# Altium PCB MainPCB.PcbDoc
Units mil, origin at the board's own origin, x right, y up, seen from the top; angles counter-clockwise.
Board outline 4750 x 2775 mil, 2 copper layers (Top Layer, Bottom Layer); 39 components, 86 nets, 187 pads, 29 vias.
Unrouted connection lines stored in the file: 1.
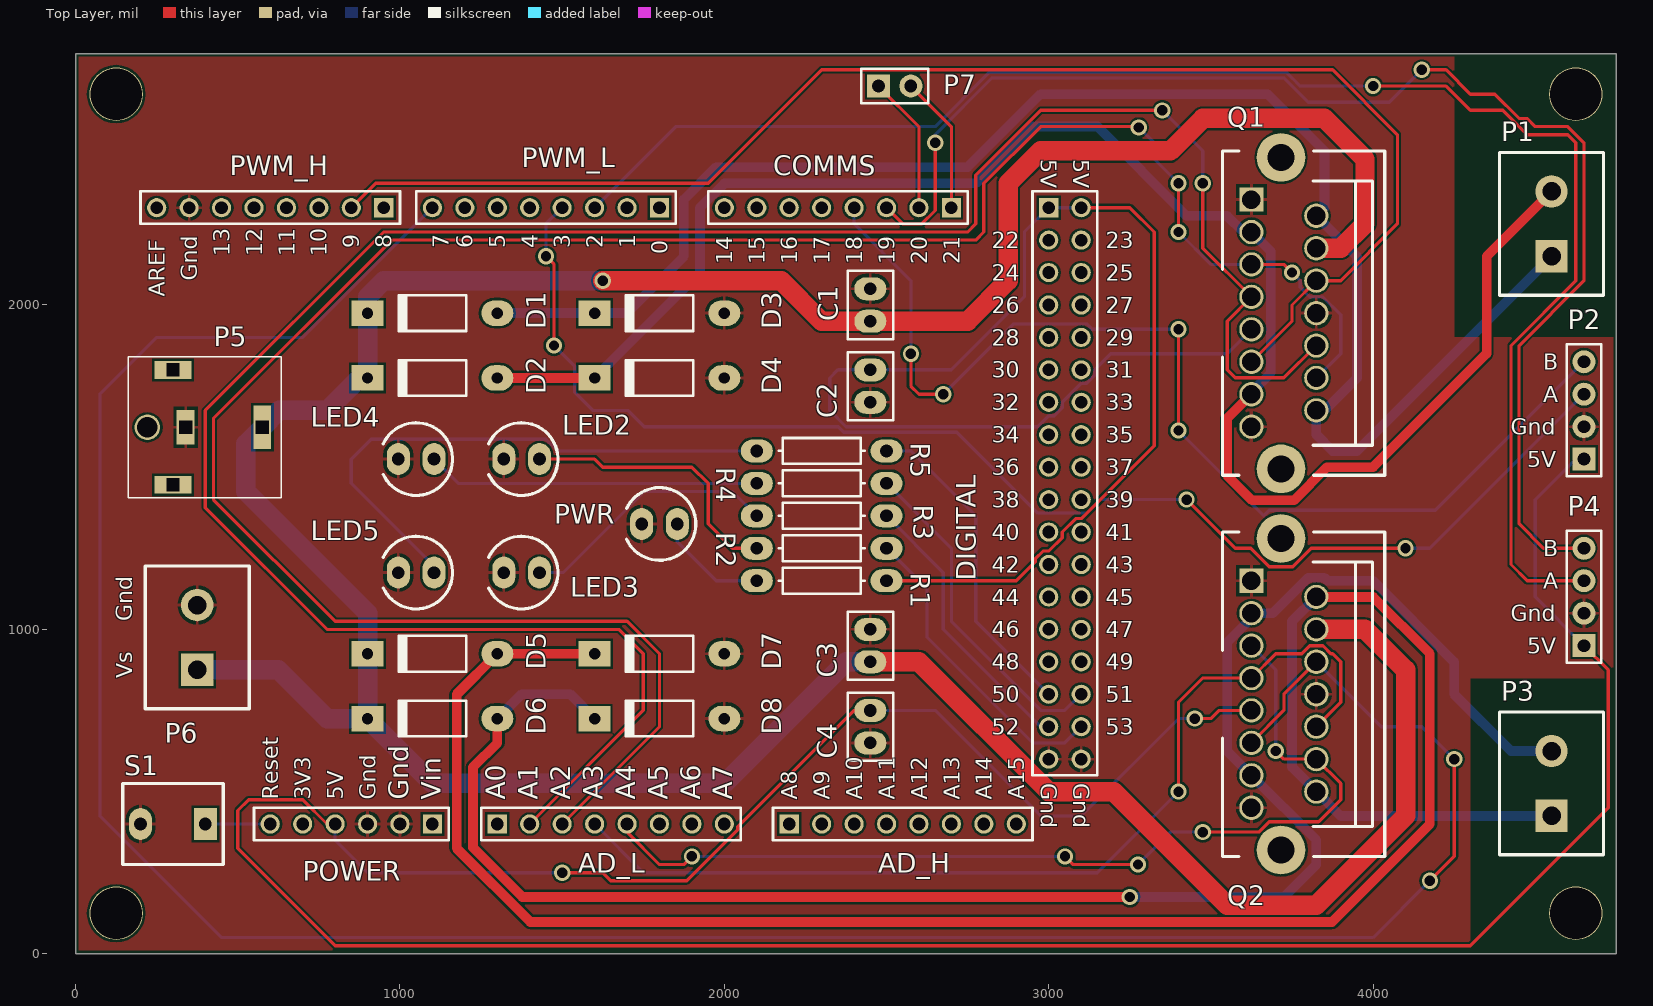
[diagram p0: Top Layer view]
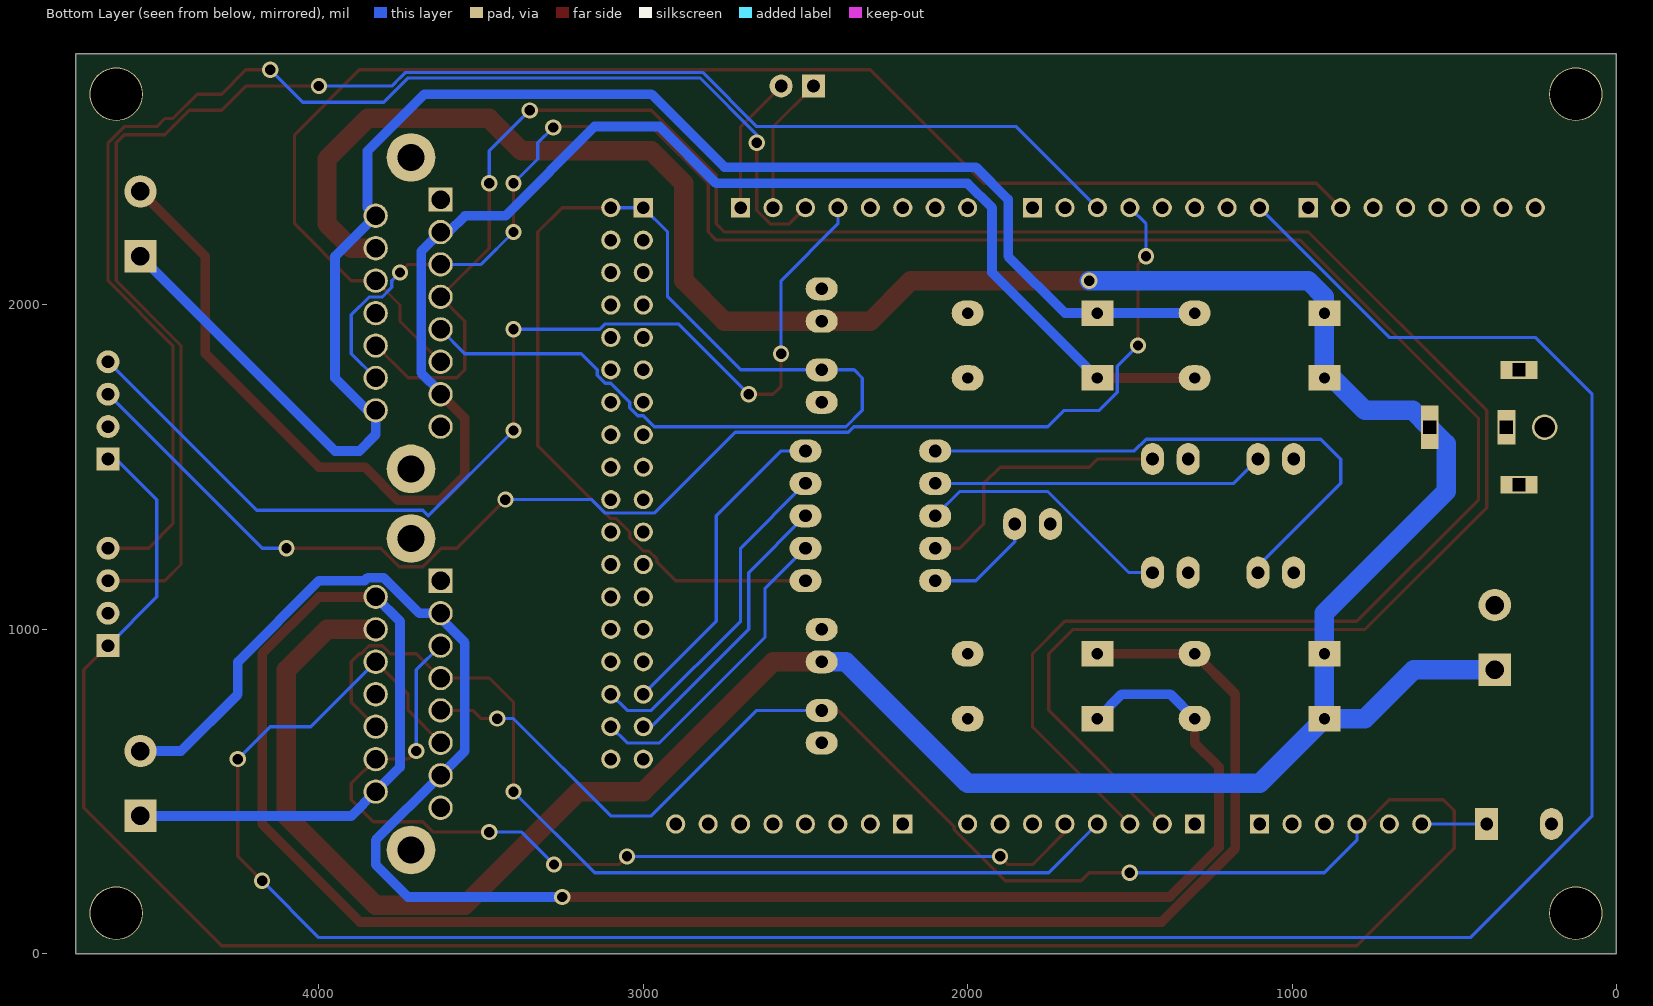
[diagram p1: Bottom Layer view, seen from below]

## Layer stack, top to bottom
Top Solder: solder mask 0.4, Solder Resist, Dk 3.5
Top Layer: signal copper 1.4
Dielectric 1: dielectric 12.6, FR-4, Dk 4.8
Bottom Layer: signal copper 1.4
Bottom Solder: solder mask 0.4, Solder Resist, Dk 3.5

## Board outline
0,0 4750,0 4750,2775 0,2775

## Design rules (kind name [scope] priority, off if disabled: settings)
AssemblyTestPointUsage [All] p1: valid=2
BoardOutlineClearance [All] p1: gap=10
Clearance [All] p1: gap=7
ComponentClearance [All] p1: gap=0 collisioncheckmode=3 verticalgap=0 showdistances=FALSE
FabricationTestPointUsage [All] p1: valid=2 allowmultiple=FALSE
FabricationTestPointUsage TestPointUsage [All] p2: valid=0 allowmultiple=FALSE
FabricationTestpoint Testpoint [All] p2: side=3 testpointundercomponent=TRUE minsize=40 maxsize=100 preferedsize=60 minholesize=0 maxholesize=40 preferedholesize=32 testpointgrid=1 allowsidetop=TRUE allowsidebottom=TRUE usegrid=TRUE gridtolerance=0.01
Height [All] p1: minheight=0 maxheight=2000 prefheight=500
HoleSize NPTH_withPads [(PadIsPlated = 'False') AND ((HoleDiameter < PadXSize_AllLayers ) OR (HoleDiameter < PadYSize_AllLayers))] p1: absolutevalues=TRUE maxlimit=0 minlimit=0 maxpercent=80.000 minpercent=20.000
HoleSize PadlessThruHole [(PadIsPlated = 'True') And ((HoleDiameter >= PadXSize_AllLayers ) OR (HoleDiameter >= PadYSize_AllLayers))] p2: absolutevalues=TRUE maxlimit=0 minlimit=0 maxpercent=80.000 minpercent=20.000
HoleSize HoleSize20 [HoleSize = 20 AND NOT(PadIsPlated)] p3: absolutevalues=TRUE maxlimit=20 minlimit=20 maxpercent=80.000 minpercent=20.000
HoleSize HoleSize20_p [HoleSize = 17 AND PadIsPlated] p4: absolutevalues=TRUE maxlimit=17 minlimit=17 maxpercent=80.000 minpercent=20.000
HoleSize HoleSize28 [HoleSize = 28 AND NOT(PadIsPlated)] p5: absolutevalues=TRUE maxlimit=28 minlimit=28 maxpercent=80.000 minpercent=20.000
HoleSize HoleSize28_p [HoleSize = 25 AND PadIsPlated] p6: absolutevalues=TRUE maxlimit=25 minlimit=25 maxpercent=80.000 minpercent=20.000
HoleSize HoleSize35 [HoleSize = 35 AND NOT(PadIsPlated)] p7: absolutevalues=TRUE maxlimit=35 minlimit=35 maxpercent=80.000 minpercent=20.000
HoleSize HoleSize35_p [HoleSize = 32 AND PadIsPlated] p8: absolutevalues=TRUE maxlimit=32 minlimit=32 maxpercent=80.000 minpercent=20.000
HoleSize HoleSize38 [HoleSize = 38 AND NOT(PadIsPlated)] p9: absolutevalues=TRUE maxlimit=38 minlimit=38 maxpercent=80.000 minpercent=20.000
HoleSize HoleSize38_p [HoleSize = 35 AND PadIsPlated] p10: absolutevalues=TRUE maxlimit=35 minlimit=35 maxpercent=80.000 minpercent=20.000
HoleSize HoleSize42 [HoleSize = 42 AND NOT(PadIsPlated)] p11: absolutevalues=TRUE maxlimit=42 minlimit=42 maxpercent=80.000 minpercent=20.000
HoleSize HoleSize42_p [HoleSize = 39 AND PadIsPlated] p12: absolutevalues=TRUE maxlimit=39 minlimit=39 maxpercent=80.000 minpercent=20.000
HoleSize HoleSize52 [HoleSize = 52 AND NOT(PadIsPlated)] p13: absolutevalues=TRUE maxlimit=52 minlimit=52 maxpercent=80.000 minpercent=20.000
HoleSize HoleSize52_p [HoleSize = 49 AND PadIsPlated] p14: absolutevalues=TRUE maxlimit=49 minlimit=49 maxpercent=80.000 minpercent=20.000
HoleSize HoleSize60 [HoleSize = 60 AND NOT(PadIsPlated)] p15: absolutevalues=TRUE maxlimit=60 minlimit=60 maxpercent=80.000 minpercent=20.000
HoleSize HoleSize60_p [HoleSize = 57 AND PadIsPlated] p16: absolutevalues=TRUE maxlimit=57 minlimit=57 maxpercent=80.000 minpercent=20.000
HoleSize HoleSize86 [HoleSize = 86 AND NOT(PadIsPlated)] p17: absolutevalues=TRUE maxlimit=86 minlimit=86 maxpercent=80.000 minpercent=20.000
HoleSize HoleSize86_p [HoleSize = 83 AND PadIsPlated] p18: absolutevalues=TRUE maxlimit=83 minlimit=83 maxpercent=80.000 minpercent=20.000
HoleSize HoleSize125 [HoleSize = 125 AND NOT(PadIsPlated)] p19: absolutevalues=TRUE maxlimit=125 minlimit=125 maxpercent=80.000 minpercent=20.000
HoleSize HoleSize125_p [HoleSize = 122 AND PadIsPlated] p20: absolutevalues=TRUE maxlimit=122 minlimit=122 maxpercent=80.000 minpercent=20.000
HoleSize HoleSize152 [HoleSize = 152 AND NOT(PadIsPlated)] p21: absolutevalues=TRUE maxlimit=152 minlimit=152 maxpercent=80.000 minpercent=20.000
HoleSize HoleSize152_p [HoleSize = 149 AND PadIsPlated] p22: absolutevalues=TRUE maxlimit=149 minlimit=149 maxpercent=80.000 minpercent=20.000
HoleSize HoleSizeNULL [HoleSize <> ((20 OR 28 OR 35 OR 38 OR 42 OR 52 OR 60 OR 86 OR 125 OR 152) AND NOT(PadIsPlated))] p23: absolutevalues=TRUE maxlimit=0 minlimit=0 maxpercent=80.000 minpercent=20.000
HoleSize HoleSizeNULL_p [HoleSize <> ((17 OR 25 OR 32 OR 35 OR 39 OR 49 OR 57 OR 83 OR 122 OR 149) AND PadIsPlated)] p24: absolutevalues=TRUE maxlimit=0 minlimit=0 maxpercent=80.000 minpercent=20.000
HoleSize [All] p25: absolutevalues=TRUE maxlimit=152 minlimit=1 maxpercent=80.000 minpercent=20.000
MinimumAnnularRing MinimumAnnularRing_Vias [IsVia] p1: minimumring=5
MinimumAnnularRing [All] p2: minimumring=7
MinimumSolderMaskSliver [All] p1: minsoldermaskwidth=5
PolygonConnect [All] p1: connectstyle=Relief reliefconductorwidth=10 reliefentries=4 polygonreliefangle="90 Angle" airgapwidth=10
RoutingVias RoutingViasSize_17 [HoleSize <= 17] p1: holewidth=17 width=50 viastyle="Through Hole" minholewidth=17 minwidth=27 maxholewidth=17 maxwidth=100
RoutingVias RoutingViasSize_25 [HoleSize <= 25] p2: holewidth=25 width=50 viastyle="Through Hole" minholewidth=25 minwidth=35 maxholewidth=25 maxwidth=100
RoutingVias RoutingViasSize_32 [HoleSize <= 32] p3: holewidth=32 width=50 viastyle="Through Hole" minholewidth=32 minwidth=42 maxholewidth=32 maxwidth=100
RoutingVias [All] p4: holewidth=25 width=50 viastyle="Through Hole" minholewidth=25 minwidth=50 maxholewidth=25 maxwidth=50
SilkToSilkClearance [All] p1: silktosilkclearance=0
SilkToSolderMaskClearance [All] p1: minsilkscreentomaskgap=5 clearancetoexposedcopper=FALSE
SilkToSolderMaskClearance SilkToCopperClearance [All] p2: minsilkscreentomaskgap=10 clearancetoexposedcopper=TRUE
SilkToSolderMaskClearance SilkscreenOverComponentPads [IsPad] p3: minsilkscreentomaskgap=10 clearancetoexposedcopper=TRUE
SolderMaskExpansion [All] p1: expansion=4
Width [All] p1: maxlimit=500 minlimit=7 preferedwidth=10
22 further rules are at their usual default settings.

## Classes and differential pairs
component class "Top Level": S1
component class "Slot Detectors": P2 P4 P7
component class "Current Driver 2": C3 C4 D5 D6 D7 D8 P3 Q2
component class "Current Driver 1": C1 C2 D1 D2 D3 D4 P1 Q1
component class "Arduino Mega": AD_H AD_L COMMS DIGITAL POWER PWM_H PWM_L
component class "Power Supply": P5 P6
component class "LED Array": LED2 LED3 LED4 LED5 PWR R1 R2 R3 R4 R5

## Components (designator, comment, footprint, x,y, rotation, side; value= is the part's Value field where it differs from the comment)
AD_H "AD_H" HDR1X8 2200,400 r0 top
AD_L "AD_L" HDR1X8 1300,400 r0 top
C1 "G-Cap" Cap2.54mm_LGE1.0 2450,2000 r90 top
C2 "G-Cap" Cap2.54mm_LGE1.0 2450,1750 r90 top
C3 "G-Cap" Cap2.54mm_LGE1.0 2450,950 r90 top
C4 "G-Cap" Cap2.54mm_LGE1.0 2450,700 r90 top
COMMS "Communication" HDR1X8 2700,2300 r180 top
D1 "1N4148" DO-41_XLGE1.2 1100,1975 r180 top
D2 "1N4148" DO-41_XLGE1.2 1100,1775 r180 top
D3 "1N4148" DO-41_XLGE1.2 1800,1975 r180 top
D4 "1N4148" DO-41_XLGE1.2 1800,1775 r180 top
D5 "1N4148" DO-41_XLGE1.2 1100,925 r180 top
D6 "1N4148" DO-41_XLGE1.2 1100,725 r180 top
D7 "1N4148" DO-41_XLGE1.2 1800,925 r180 top
D8 "1N4148" DO-41_XLGE1.2 1800,725 r180 top
DIGITAL "IO_36" HDR2X18 3000,2300 r270 top
LED2 "C503B-RAN-CY0B0AA1" LED_LGE1.0 1375,1525 r180 top
LED3 "C503B-RAN-CY0B0AA1" LED_LGE1.0 1375,1175 r180 top
LED4 "C503B-RAN-CY0B0AA1" LED_LGE1.0 1050,1525 r180 top
LED5 "C503B-RAN-CY0B0AA1" LED_LGE1.0 1050,1175 r180 top
P1 "Term-Block 2" TERM-BLOCK-5.08MM-2POS 4550,2350 r90 top
P2 "C-Hdr1x4" HDR1X4_LGE1.0 4650,1675 r90 top
P3 "Term-Block 2" TERM-BLOCK-5.08MM-2POS 4550,625 r90 top
P4 "C-Hdr1x4" HDR1X4_LGE1.0 4650,1100 r90 top
P5 "PJ-063AH" PJ-063AH 575.59,1622.83 r90 top
P6 "Term-Block 2" TERM-BLOCK-5.08MM-2POS 375,1075 r90 top
P7 "C-Hdr1x2" HDR1X2_LGE1.0 2525,2675 r0 top
POWER "POWER" HDR1X6 1100,400 r180 top
PWM_H "PWM_H" HDR1X8 950,2300 r180 top
PWM_L "PWM_L" HDR1X8 1800,2300 r180 top
PWR "C503B-RAN-CY0B0AA1" LED_LGE1.0 1800,1325 r180 top (schematic designator LED1)
Q1 "Q-LN298HS" Multiwatt15_V_ELEC391HS 3825,1975 r270 top
Q2 "Q-LN298HS" Multiwatt15_V_ELEC391HS 3825,800 r270 top
R1 "G-Res" Res10mm_LGE1.0 2300,1150 r0 top
R2 "G-Res" Res10mm_LGE1.0 2300,1250 r0 top
R3 "G-Res" Res10mm_LGE1.0 2300,1350 r0 top
R4 "G-Res" Res10mm_LGE1.0 2300,1450 r0 top
R5 "G-Res" Res10mm_LGE1.0 2300,1550 r0 top
S1 "P-Btn" SPST-2_LGE1.0 300,400 r180 top

## Footprints (in the part's own frame and the unit in brackets; to place one, negate y for a bottom-side part, rotate by r counter-clockwise, add the part's x,y. Pads: shape width x height; smd on the part's side, far side on the other; paste and mask are expansions set on the pad)
Cap2.54mm_LGE1.0 [mm] "Capacitor, Ceramic, Thru-Hole, Dipped Radial; Body 5.1 x 3.2 mm (WxT) Pin Spacing 2.54 mm (typ)"
  oval 1.8x2.5 hole 0.991: 1(-1.27,0) 2(1.27,0)
  silkscreen extent -2.67,-1.78 2.67,1.78
DO-41_XLGE1.2 [mm] "Diode, Axial; Body 5.2 x 2.7 mm (LxDia. max), Lead Dia. 0.86 mm (max)"
  oval 2.5x2 hole 0.889: 1(-5.08,0)
  rect 2.5x2 hole 0.889: 2(5.08,0)
  silkscreen extent -2.65,-1.4 2.75,1.4, body extent -5.44,-1.28 5.49,1.28, height 2.76
HDR1X2_LGE1.0 [mm] "Connector; Header; 2 Position"
  rect 1.8x1.8 hole 0.991: 1(-1.27,0)
  round 1.8 hole 0.991: 2(1.27,0)
  silkscreen extent -2.63,-1.36 2.63,1.36, body extent -2.54,-1.24 2.54,1.25, height 8.54
HDR1X4_LGE1.0 [mm] "Connector; Header; 4 Position"
  rect 1.8x1.8 hole 0.991: 1(-3.81,0)
  round 1.8 hole 0.991: 2(-1.27,0) 3(1.27,0) 4(3.81,0)
  silkscreen extent -5.17,-1.36 5.17,1.36, body extent -4.95,-1.24 5.21,1.25, height 8.54
HDR1X6 [mm] "Connector; Header; 6 Position"
  rect 1.5x1.5 hole 0.991: 1(0,0)
  round 1.5 hole 0.991: 2(2.54,0) 3(5.08,0) 4(7.62,0) 5(10.16,0) 6(12.7,0)
  silkscreen extent -1.27,-1.27 13.97,1.27
HDR1X8 [mm] "Connector; Header; 8 Position"
  rect 1.5x1.5 hole 0.991: 1(0,0)
  round 1.5 hole 0.991: 2(2.54,0) 3(5.08,0) 4(7.62,0) 5(10.16,0) 6(12.7,0) 7(15.24,0) 8(17.78,0)
  silkscreen extent -1.27,-1.27 19.05,1.27
HDR2X18 [mm] "Connector; Header; 18x2 Position"
  rect 1.5x1.5 hole 0.991: 1(0,0)
  round 1.5 hole 0.991: 2(0,2.54) 3(2.54,0) 4(2.54,2.54) 5(5.08,0) 6(5.08,2.54) 7(7.62,0) 8(7.62,2.54) 9(10.16,0) 10(10.16,2.54) 11(12.7,0) 12(12.7,2.54) 13(15.24,0) 14(15.24,2.54) 15(17.78,0) 16(17.78,2.54) 17(20.32,0) 18(20.32,2.54) 19(22.86,0) 20(22.86,2.54) 21(25.4,0) 22(25.4,2.54) 23(27.94,0) 24(27.94,2.54) 25(30.48,0) 26(30.48,2.54) 27(33.02,0) 28(33.02,2.54) 29(35.56,0) 30(35.56,2.54) 31(38.1,0) 32(38.1,2.54) 33(40.64,0) 34(40.64,2.54) 35(43.18,0) 36(43.18,2.54)
  silkscreen extent -1.27,-1.27 44.45,3.81
LED_LGE1.0 [mil] "2.8 mm (typ)"
  oval 70.87x98.43 hole 39: 1(-55,0) 2(55,0)
  silkscreen extent -112,-112 102,112, body extent -118,-120 96,117, height 484
Multiwatt15_V_ELEC391HS [mil]
  rect 75x75 hole 57: 1(-350,-200)
  round 75 hole 57: 2(-300,0) 3(-250,-200) 4(-200,0) 5(-150,-200) 6(-100,0) 7(-50,-200) 8(0,0) 9(50,-200) 10(100,0) 11(150,-200) 12(200,0) 13(250,-200) 14(300,0) 15(350,-200)
  round 150 hole 83: 16(480,-109) 17(-480,-109)
  silkscreen extent -500,-289 500,211, body extent -385,-200 387,157, height 826
PJ-063AH [mm]
  rect 3.4x1.4 hole 1 square: 1(0,0)
  rect 2.7x1.4 hole 1 square: 2(0,6)
  rect 1.4x2.9 hole 1 square: 3(4.5,7) 4(-4.5,7)
  round 2 hole 1.6: 5(0,9)
  silkscreen extent -5.5,-1.5 5.52,10.5, body extent -5.15,-1 5.15,12, height 9
Res10mm_LGE1.0 [mm] "Axial Device, Thru-Hole; 2 Leads; 0.4 in Pin Spacing"
  oval 2.5x1.8 hole 0.991: 1(-5.08,0) 2(5.08,0)
  silkscreen extent -3.37,-1.02 3.37,1.02
SPST-2_LGE1.0 [mm] "Circuit Breaker; 2 Leads"
  rect 1.8x2.5 hole 0.991: 1(-2.54,0)
  oval 1.8x2.5 hole 0.991: 2(2.54,0)
  silkscreen extent -3.94,-3.18 3.94,3.18
TERM-BLOCK-5.08MM-2POS [mil] "TERM BLOCK 5.08MM VERT 2POS PCB"
  rect 100x100 hole 57: 1(-200,0)
  round 100 hole 57: 2(0,0)
  silkscreen extent -320,-160 120,160

## Part data
C1 C2 C3 C4: "Capacitor (specify value)"
D1 D2 D3 D4 D5 D6 D7 D8: library part T-DiodeRect, "High-speed Diode"
LED2 LED3 LED4 LED5 PWR: library part T-LEDRedHI, "LED (high intensity - red)"
P1 P3 P6: library part C-Block2, "Terminal-Block 1x2"
P2 P4: "Header, 4-Pin"
P7: "Header, 2-Pin"
Q1 Q2: "LN298 - IC Bridge Driver Par 15Multiwatt"
R1 R2 R3 R4 R5: "Resistor (specify value)"
S1: "Push Button"

## Free pads (board coordinates)
  round 165 hole 158: 5(125,2650) 6(4625,2650) 7(4625,125) 8(125,125)

## Via types
v1: diameter 50, hole 32, Top Layer to Bottom Layer, 29 vias

## Nets (pads, with @x,y where several pads share a name; then routed paths per layer and width w, separated by ;. In a path a pad name is that pad's centre, name@x,y a point inside that pad or via, vN(x,y) a via of type N, cw(c..) or ccw(c..) an arc to the next point about the centre after c; other vN are vias at no path point)
3V3: POWER.5
5V: C2.2 C4.2 DIGITAL.1 DIGITAL.2 P2.1 P4.1 POWER.4 Q1.9 Q2.9 R1.2 | length 14270.1
  Top Layer w10: POWER.4@800,417.2 POWER.4 775,400 700,475 533.47,475 500,441.53 500,325 800,25 4300,25 4725,450 4725,875 P4.1 ; v1(1500,250) 1625,250 1650,225 1883.73,225 2041.53,382.8 2041.53,391.53 2400,750 C4.2 ; R1.2 2900,1150 2958.47,1208.47 2958.47,1217.2 2982.8,1241.53 3000.26,1241.53 3041.53,1282.8 3041.53,1300.26 3082.8,1341.53 3100.26,1341.53 3325,1566.27 3325,2225 3250,2300 DIGITAL.2 ; v1(3450,725) 3500,725 3525,750 Q2.9
  Bottom Layer w10: POWER.4 800,350 900,250 v1(1500,250) ; C4.2 2650,750 2975,425 3100,425 3400,725 v1(3450,725) ; DIGITAL.2 DIGITAL.1 2925,2225 2925,2025 2700,1800 C2.2 2350,1800 2325,1775 2325,1675 2375,1625 2966.27,1625 2999.74,1658.47 3017.2,1658.47 3041.53,1682.8 3041.53,1700.26 3099.74,1758.47 3117.2,1758.47 3141.53,1782.8 3141.53,1800.26 3191.27,1850 3550,1850 Q1.9 ; P4.1 4500,1100 4500,1400 4625,1525 P2.1
AD0: AD_L.1
AD1: AD_L.2 Q1.7 Q1.10 | length 7198.7
  Top Layer w10: AD_L.2 1750,750 1750,925 1675,1000 775,1000 400,1375 400,1675 950,2225 2750,2225 2775,2250 2775,2400 2975,2600 v1(3350,2600) ; v1(3475,2375) 3475,2175 Q1.7 3550,1950 3550,1800 3574.5,1775.5 3724.5,1775.5 3824,1875 Q1.10
  Bottom Layer w10: v1(3350,2600) 3475,2475 v1(3475,2375)
AD2: AD_L.3 Q1.5 Q1.12 | length 7001.9
  Top Layer w10: AD_L.3 1800,700 1800,925 1700,1025 800,1025 425,1400 425,1650 975,2200 2775,2200 2800,2225 2800,2375 2975,2550 3275,2550 v1(3277.81,2547.2) ; v1(3400,2225) v1(3400,2375) ; Q1.5 3725,2125 v1(3750,2100)
  Bottom Layer w10: v1(3277.81,2547.2) 3325,2500 3325,2450 v1(3400,2375) ; v1(3400,2225) 3500,2125 Q1.5 ; v1(3750,2100) 3775.5,2074.5 3775.5,2054.5 3805.5,2024.5 3845.5,2024.5 3900,1970 3900,1850 Q1.12
AD3: AD_L.4 Q2.7 Q2.10 | length 3064.5
  Top Layer w10: v1(3400,500) 3400,775 3475,850 Q2.7 3700,925 3780,925 3804.5,949.5 3845.5,949.5 3870,925 3875,925 3900,900 3900,775 Q2.10
  Bottom Layer w10: AD_L.4 1750,250 3150,250 v1(3400,500)
AD4: AD_L.5 Q2.5 Q2.12 | length 3017.5
  Top Layer w10: AD_L.5 1700,375 1800,275 1875,275 v1(1900,300) ; v1(3050,300) 3075,275 v1(3275,275) ; v1(3475,375) 3647.96,375 3679.96,407 3832,407 3900,475 3900,525 Q2.12 3725,600 v1(3700,625)
  Bottom Layer w10: v1(1900,300) v1(3050,300) ; v1(3275,275) 3375,375 v1(3475,375) ; Q2.5 3700,875 v1(3700,625)
AD5: AD_L.6
AD6: AD_L.7
AD7: AD_L.8
AD8: AD_H.1
AD9: AD_H.2
AD10: AD_H.3
AD11: AD_H.4
AD12: AD_H.5
AD13: AD_H.6
AD14: AD_H.7
AD15: AD_H.8
AREF: PWM_H.8
GND: C1.2 C2.1 C3.2 C4.1 D3.1 D4.1 D7.1 D8.1 DIGITAL.35 DIGITAL.36 LED2.2 LED3.2 LED4.2 LED5.2 P2.2 P4.2 P5.2 P6.2 POWER.2 POWER.3 PWM_H.7 PWR.2 Q1.1 Q1.8 Q1.15 Q2.1 Q2.8 Q2.15 S1.2
IO22: DIGITAL.3
IO23: DIGITAL.4
IO24: DIGITAL.5
IO25: DIGITAL.6
IO26: DIGITAL.7
IO27: DIGITAL.8
IO28: DIGITAL.9
IO29: DIGITAL.10
IO30: DIGITAL.11
IO31: DIGITAL.12
IO32: DIGITAL.13
IO33: DIGITAL.14
IO34: DIGITAL.15
IO35: DIGITAL.16
IO36: DIGITAL.17
IO37: DIGITAL.18
IO38: DIGITAL.19
IO39: DIGITAL.20
IO40: DIGITAL.21
IO41: DIGITAL.22
IO42: DIGITAL.23
IO43: DIGITAL.24
IO44: DIGITAL.25
IO45: DIGITAL.26
IO46: DIGITAL.27
IO47: DIGITAL.28
IO48: DIGITAL.29
IO49: DIGITAL.30
IO50: DIGITAL.31 R5.2 | length 1001
  Bottom Layer w10: R5.2 2575,1550 2775,1350 2775,1025 DIGITAL.31
IO51: DIGITAL.32 R4.2 | length 1042.5
  Bottom Layer w10: R4.2 2700,1250 2700,1025 2975,750 3050,750 DIGITAL.32
IO52: DIGITAL.33 R3.2 | length 871.8
  Bottom Layer w10: R3.2 2675,1175 2675,1000 2975,700 DIGITAL.33
IO53: DIGITAL.34 R2.2 | length 957.1
  Bottom Layer w10: R2.2 2625,1125 2625,975 2950,650 3050,650 DIGITAL.34
NetLED1_1: PWR.1 R1.1 | length 349.7
  Bottom Layer w10: PWR.1 1855,1270 1975,1150 R1.1
NetLED2_1: LED2.1 R2.1 | length 857.1
  Top Layer w10: LED2.1 1600,1525 1625,1500 1900,1500 1950,1450 1950,1325 2025,1250 R2.1
NetLED3_1: LED3.1 R3.1 | length 804.6
  Bottom Layer w10: LED3.1 1502.57,1175 1752.57,1425 2025,1425 R3.1
NetLED4_1: LED4.1 R4.1 | length 1026.1
  Bottom Layer w10: LED4.1 1180,1450 R4.1
NetLED5_1: LED5.1 R5.1 | length 1746
  Bottom Layer w10: LED5.1 1105,1195 850,1450 850,1525 911.21,1586.21 1449.65,1586.21 1485.86,1550 R5.1
PWM2: P4.3 PWM_L.3 | length 4916.2
  Top Layer w10: v1(4000,2675) 4225,2675 4300,2600 4400,2600 4475,2525 4600,2525 4625,2500 4625,2075 4425,1875 4425,1200 4475,1150 P4.3
  Bottom Layer w10: PWM_L.3 1850,2550 2650,2550 2817,2717 3732.04,2717 3749.04,2700 3750,2700 3775,2675 v1(4000,2675)
PWM3: P2.3 PWM_L.4 | length 4215.5
  Top Layer w10: v1(1450,2150) 1475,2125 v1(1475,1875) ; v1(3425,1400) 3575,1250 3622.96,1250 3679.96,1193 3752.04,1193 3809.04,1250 v1(4100,1250)
  Bottom Layer w10: v1(1450,2150) 1450,2250 PWM_L.4 ; v1(1475,1875) 1538.79,1811.21 1538.79,1730.66 1594.45,1675 1702.81,1675 1752.81,1625 2350.96,1625 2367.96,1608 2717,1608 2966.53,1358.47 3117.2,1358.47 3158.73,1400 v1(3425,1400) ; v1(4100,1250) 4175,1250 P2.3
PWM4: PWM_L.5
PWM5: PWM_L.6
PWM6: PWM_L.7
PWM7: PWM_L.8 Q2.6 Q2.11 | length 8179.2
  Top Layer w10: Q2.11 3725,750 3725,800 Q2.6 ; v1(4175,225) 4250,300 v1(4250,600)
  Bottom Layer w10: PWM_L.8 700,1900 250,1900 75,1725 75,425 450,50 4000,50 v1(4175,225) ; Q2.6 4025,700 4150,700 v1(4250,600)
PWM8: PWM_H.1
PWM9: PWM_H.2 Q1.6 Q1.11 | length 4414.2
  Top Layer w10: PWM_H.2 925,2375 1950,2375 2300,2725 3875,2725 4075,2525 4075,2250 3900,2075 Q1.6 3750,2000 3750,1950 Q1.11
PWM10: PWM_H.3
PWM11: PWM_H.4
PWM12: PWM_H.5
PWM13: PWM_H.6
RESET: POWER.6 S1.1 | length 200
  Bottom Layer w10: S1.1 POWER.6
RX0: PWM_L.1
RX1: COMMS.3 P4.4 | length 4148.6
  Top Layer w10: COMMS.3 2550,2250 2608.73,2250 2650,2291.27 v1(2650,2500) ; v1(4150,2725) 4225,2725 4300,2650 4375,2650 4450,2575 4475,2575 4500,2550 4600,2550 4650,2500 4650,2075 4450,1875 4450,1325 4525,1250 P4.4
  Bottom Layer w10: v1(2650,2500) 2650,2525 2825,2700 3725,2700 3800,2625 4050,2625 v1(4150,2725)
RX2: COMMS.5
RX3: COMMS.7
SCL: COMMS.1 P7.2 | length 426.8
  Top Layer w10: P7.2 2700,2550 COMMS.1
SDA: COMMS.2 P7.1 | length 426.8
  Top Layer w10: P7.1 2600,2550 COMMS.2
TX0: PWM_L.2
TX1: COMMS.4 P2.4 | length 3422.1
  Top Layer w10: v1(2575,1850) 2575,1750 2600,1725 v1(2675,1725) ; v1(3400,1612.96) v1(3400,1925)
  Bottom Layer w10: COMMS.4 2400,2250 2575,2075 v1(2575,1850) ; v1(2675,1725) 2891.53,1941.53 3117.2,1941.53 3133.73,1925 v1(3400,1925) ; v1(3400,1612.96) 3662.96,1350 3679.96,1367 4192,1367 P2.4
TX2: COMMS.6
TX3: COMMS.8
V+1: D2.1 D4.2 P1.2 Q1.3 Q1.13 | length 5305.1
  Top Layer w30: D2.1 D4.2 ; Q1.13 3550,1650 3550,1475 3627,1398 3756.18,1398 3858.18,1500 4000,1500 4350,1850 4350,2150 P1.2
  Bottom Layer w30: D4.2 1925,2100 1925,2300 2000,2375 2775,2375 2950,2550 3150,2550 3425,2275 3550,2275 Q1.3@3600,2225 ; Q1.13 3625,1731.35 3684.5,1790.85 3684.5,2165.5 Q1.3
V+2: D6.1 D8.2 P3.2 Q2.3 Q2.13 | length 5672.3
  Top Layer w30: D6.1 1300,650 1225,575 1225,327.33 1377.33,175 v1(3250,175)
  Bottom Layer w30: D6.1 1375,800 1525,800 D8.2 ; v1(3250,175) 3725,175 3825,275 3825,350 Q2.13 3550,625 3550,959.15 Q2.3@3640.85,1050 ; Q2.3 Q2.3@3640.85,1050 ; P3.2 4425,625 4250,800 4250,900 4000,1150 3859.15,1150 3849.65,1159.5 3800.35,1159.5 3690.85,1050 Q2.3@3640.85,1050
V-1: D1.1 D3.2 P1.1 Q1.2 Q1.14 | length 5002.4
  Bottom Layer w30: D1.1 D3.2 1700,1975 1875,2150 1875,2325 1975,2425 2750,2425 2975,2650 3675,2650 3850,2475 3850,2300 Q1.2 3950,2150 3950,1775 3850,1675 Q1.14 3825,1600 3875,1550 3950,1550 P1.1
V-2: D5.1 D7.2 P3.1 Q2.2 Q2.14 | length 6536.6
  Top Layer w30: D7.2 D5.1 1175,800 1175,325 1402,98 3873,98 4175,400 4175,925 4000,1100 Q2.2
  Bottom Layer w30: Q2.2 3750,1025 3750,575 Q2.14 3900,425 P3.1
VIN: POWER.1
VS: C1.1 C3.1 D1.2 D2.2 D5.2 D6.2 P5.1 P6.1 Q1.4 Q2.4 | length 10953.2
  Top Layer w60: v1(1625,2075) 2175,2075 2300,1950 C1.1 2750,1950 2875,2075 2875,2375 2975,2475 3375,2475 3475,2575 3850,2575 3975,2450 3975,2250 3900,2175 Q1.4 ; C3.1 2600,900 3000,500 3200,500 3550,150 3825,150 4100,425 4100,875 3975,1000 Q2.4
  Bottom Layer w60: P6.1 625,875 775,725 D6.2 ; v1(1625,2075) 950,2075 900,2025 D1.2 D2.2 875,1775 775,1675 627.76,1675 P5.1 525,1572.24 525,1425 900,1050 D5.2 D6.2 ; C3.1 2375,900 2000,525 1100,525 D6.2
pads on no net: P5.3 P5.4 P5.5 Q1.16 Q1.17 Q2.16 Q2.17

## Polygon pours and split planes (outlines as drawn)
GND on Top Layer "GND" (solid, remove dead copper, pour order 6): 0,2775 0,0 4300,0 4300,850 4750,850 4750,1900 4250,1900 4250,2775

## Silkscreen, mask and mechanical layers (free items; w line width, h text height)
Top Overlay:
  text "0" at 1825,2200 h50 r90
  text "9" at 875,2175 h50 r90
  text "8" at 975,2175 h50 r90
  text "7" at 1150,2175 h50 r90
  text "6" at 1225,2175 h50 r90
  text "5" at 1325,2175 h50 r90
  text "4" at 1425,2175 h50 r90
  text "3" at 1525,2175 h50 r90
  text "2" at 1625,2175 h50 r90
  text "1" at 1725,2175 h50 r90
  text "22" at 2825,2175 h50
  text "23" at 3175,2175 h50
  text "13" at 475,2150 h50 r90
  text "12" at 575,2150 h50 r90
  text "11" at 675,2150 h50 r90
  text "10" at 775,2150 h50 r90
  text "14" at 2025,2125 h50 r90
  text "15" at 2125,2125 h50 r90
  text "16" at 2225,2125 h50 r90
  text "17" at 2325,2125 h50 r90
  text "18" at 2425,2125 h50 r90
  text "19" at 2525,2125 h50 r90
  text "20" at 2625,2125 h50 r90
  text "21" at 2725,2125 h50 r90
  text "Gnd" at 375,2075 h50 r90
  text "24" at 2825,2075 h50
  text "25" at 3175,2075 h50
  text "AREF" at 275,2025 h50 r90
  text "26" at 2825,1975 h50
  text "27" at 3175,1975 h50
  text "28" at 2825,1875 h50
  text "29" at 3175,1875 h50
  text "B" at 4525,1800 h50
  text "30" at 2825,1775 h50
  text "31" at 3175,1775 h50
  text "A" at 4525,1700 h50
  text "32" at 2825,1675 h50
  text "33" at 3175,1675 h50
  text "Gnd" at 4425,1600 h50
  text "34" at 2825,1575 h50
  text "35" at 3175,1575 h50
  text "5V" at 4475,1500 h50
  text "36" at 2825,1475 h50
  text "37" at 3175,1475 h50
  text "38" at 2825,1375 h50
  text "39" at 3175,1375 h50
  text "40" at 2825,1275 h50
  text "41" at 3175,1275 h50
  text "B" at 4525,1225 h50
  text "42" at 2825,1175 h50
  text "43" at 3175,1175 h50
  text "A" at 4525,1125 h50
  text "44" at 2825,1075 h50
  text "45" at 3175,1075 h50
  text "Gnd" at 175,1025 h50 r90
  text "Gnd" at 4425,1025 h50
  text "46" at 2825,975 h50
  text "47" at 3175,975 h50
  text "5V" at 4475,925 h50
  text "48" at 2825,875 h50
  text "49" at 3175,875 h50
  text "Vs" at 175,850 h50 r90
  text "50" at 2825,775 h50
  text "51" at 3175,775 h50
  text "52" at 2825,675 h50
  text "53" at 3175,675 h50
  text "Reset" at 625,475 h50 r90
  text "3V3" at 725,475 h50 r90
  text "5V" at 825,475 h50 r90
  text "Gnd" at 925,475 h50 r90
  text "Gnd" at 1025,475 h60 r90
  text "Vin" at 1125,475 h60 r90
  text "A0" at 1325,475 h60 r90
  text "A1" at 1425,475 h60 r90
  text "A2" at 1525,475 h60 r90
  text "A3" at 1625,475 h60 r90
  text "A4" at 1725,475 h60 r90
  text "A5" at 1825,475 h60 r90
  text "A6" at 1925,475 h60 r90
  text "A7" at 2025,475 h60 r90
  text "A8" at 2225,475 h50 r90
  text "A9" at 2325,475 h50 r90
  text "A10" at 2425,475 h50 r90
  text "A11" at 2525,475 h50 r90
  text "A12" at 2625,475 h50 r90
  text "A13" at 2725,475 h50 r90
  text "A14" at 2825,475 h50 r90
  text "A15" at 2925,475 h50 r90

## Text inside footprints (layer, text, board x,y; h text height)
DIGITAL: Top Overlay "Gnd" at 3075,525 h50 r270; Top Overlay "Gnd" at 2975,525 h50 r270; Top Overlay "5V" at 2975,2450 h50 r270; Top Overlay "5V" at 3075,2450 h50 r270